# Altium PCB 2_ASCII.pcbdoc
Units mm, origin at the board's own origin, x right, y up, seen from the top; angles counter-clockwise.
Board outline 38 x 32 mm, 2 copper layers (Top Layer, Bottom Layer); 28 components, 38 nets, 175 pads, 63 vias.
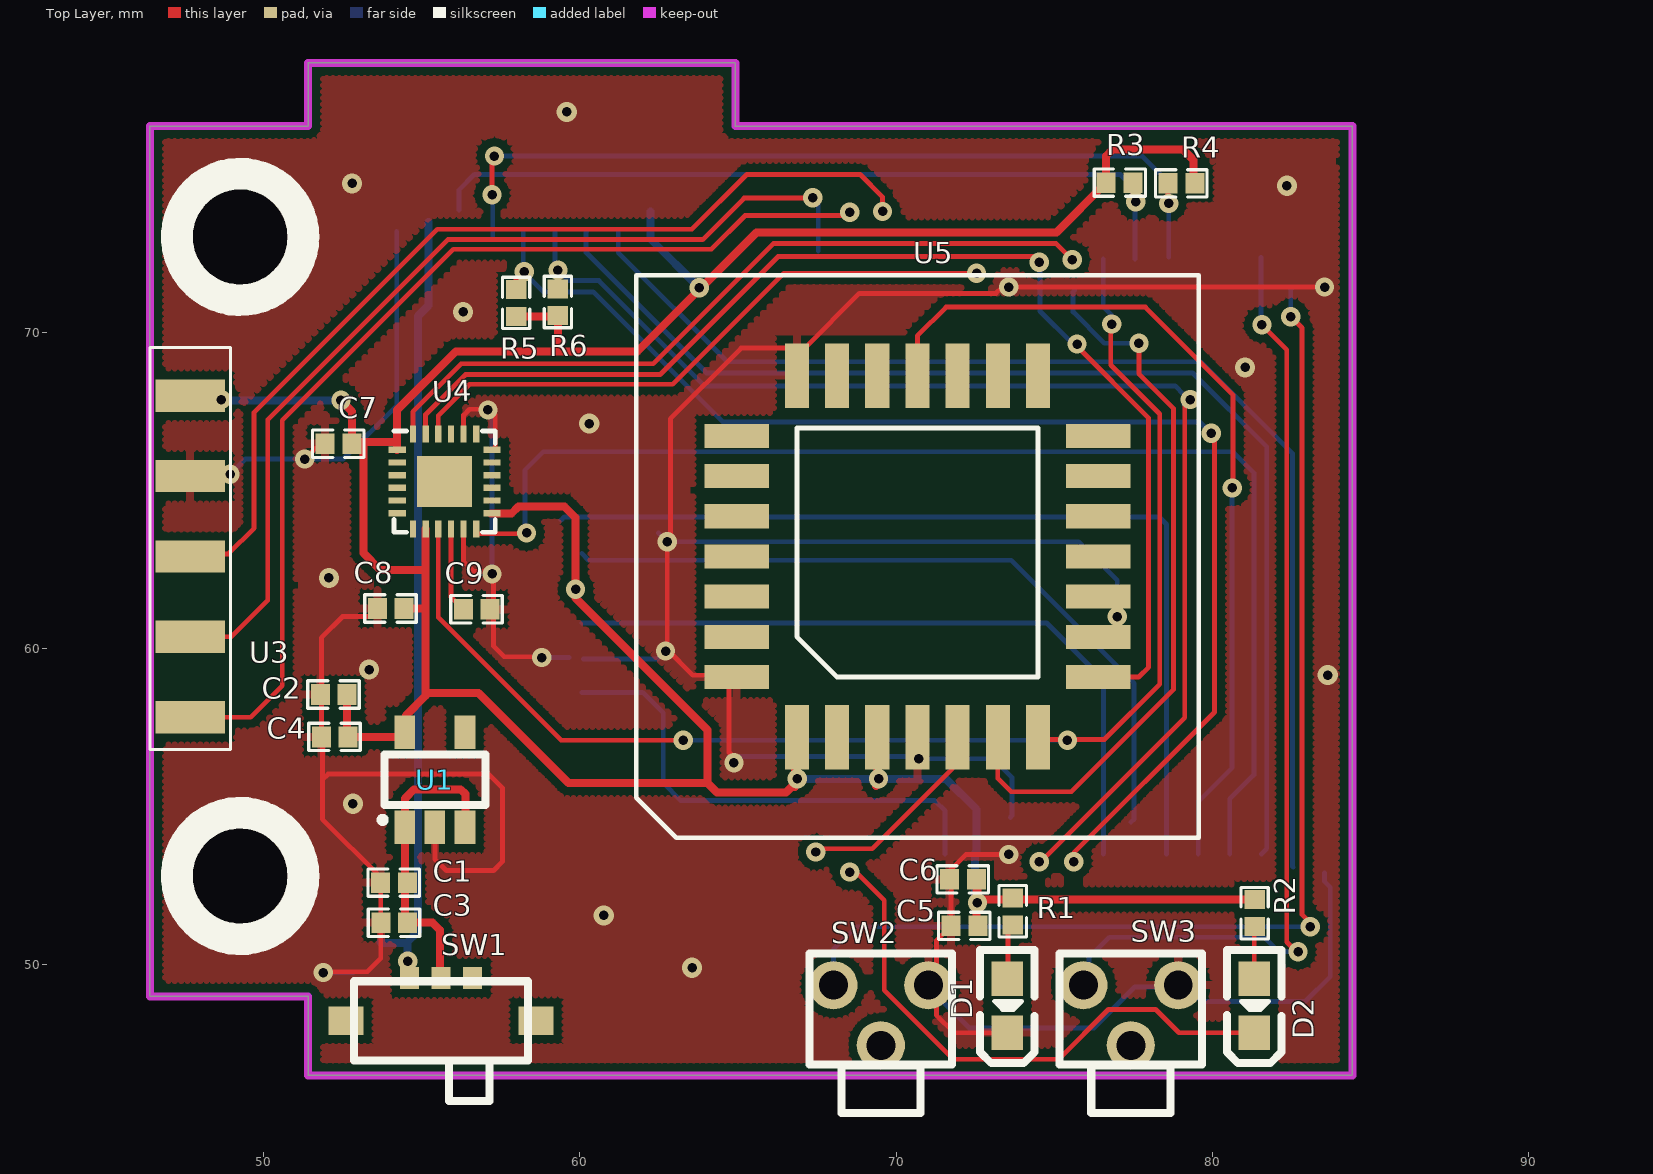
[diagram p0: Top Layer view]
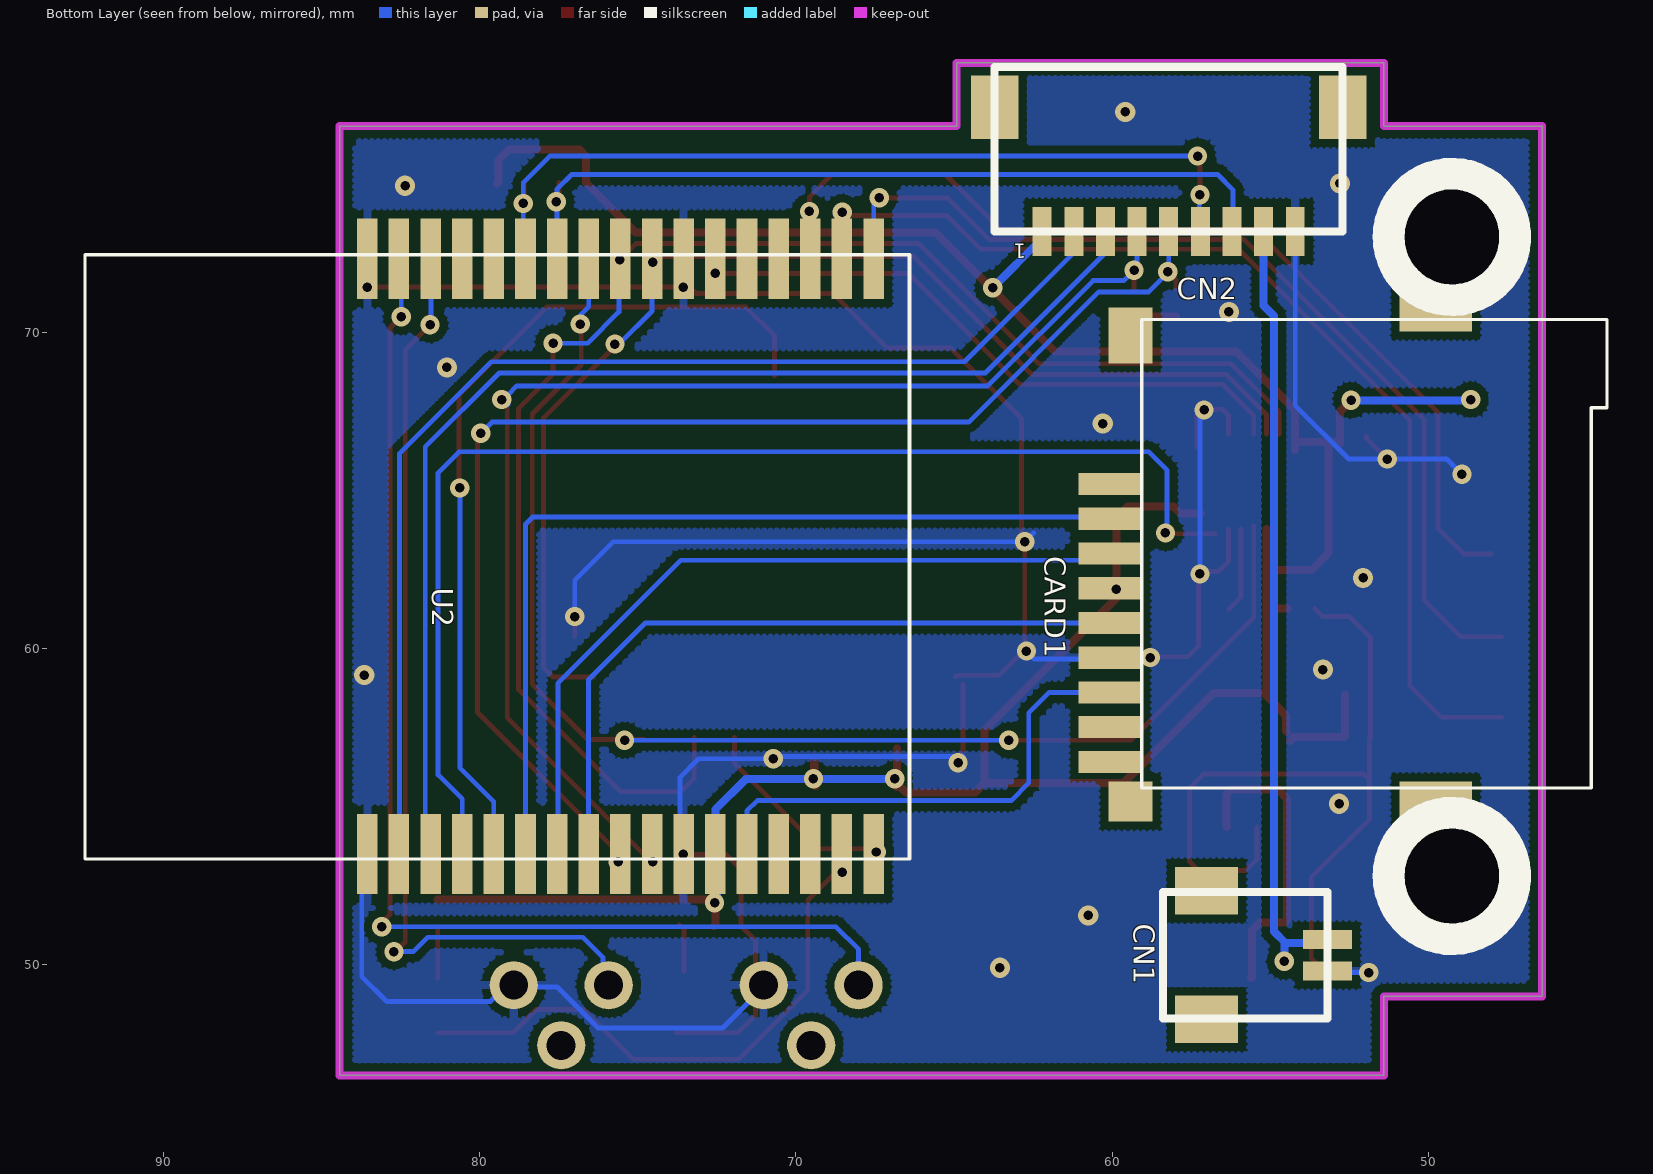
[diagram p1: Bottom Layer view, seen from below]

## Layer stack, top to bottom
Top Solder: solder mask 0.0102, Solder Resist, Dk 3.5
Top Layer: signal copper 0.0356
Dielectric1: dielectric 0.32, FR-4, Dk 4.8
Bottom Layer: signal copper 0.0356
Bottom Solder: solder mask 0.0102, Solder Resist, Dk 3.5

## Board outline
51.416,46.509 51.416,49.009 46.416,49.009 46.416,76.509 51.416,76.509 51.416,78.509 64.916,78.509 64.916,76.509 84.416,76.509 84.416,46.509

## Design rules (kind name [scope] priority, off if disabled: settings)
AssemblyTestPointUsage [All] p0: scope1count=1 scope1_0_kind=Board scope1_0_value=Board scope2count=1 scope2_0_kind=Board scope2_0_value=Board commentlength=0
AssemblyTestpoint [All] p0: scope1count=1 scope1_0_kind=Board scope1_0_value=Board scope2count=1 scope2_0_kind=Board scope2_0_value=Board commentlength=0
Clearance Clearance_1 [All] p0 off: scope1count=1 scope1_0_kind=Board scope1_0_value=Board scope2count=1 scope2_0_kind=Board scope2_0_value=Board commentlength=50 gap=0.254 // Protel DXP Scope 1 Expression Was: (InPolygon)
Clearance [All] p0: scope1count=1 scope1_0_kind=Board scope1_0_value=Board scope2count=1 scope2_0_kind=Board scope2_0_value=Board commentlength=0 gap=0.152
Clearance Clearance_1 [(InPolygon)] p1: gap=0.254 ignorepadtopadclearanceinfootprint=FALSE except(0: Arc-Hole Track-Hole SMDPad-Hole THPad-Hole Via-Hole Fill-Hole Poly-Hole Region-Hole Text-Hole)
Clearance [All] p2: gap=0.152 ignorepadtopadclearanceinfootprint=FALSE except(0: Arc-Hole Track-Hole SMDPad-Hole THPad-Hole Via-Hole Fill-Hole Poly-Hole Region-Hole Text-Hole)
ComponentClearance [All] p0 off: scope1count=1 scope1_0_kind=Board scope1_0_value=Board scope2count=1 scope2_0_kind=Board scope2_0_value=Board commentlength=0 gap=0.254 collisioncheckmode=3
ComponentClearance [All] p1 off: gap=0.254 collisioncheckmode=3 verticalgap=0.254 showdistances=FALSE
DiffPairsRouting [All] p0: scope1count=1 scope1_0_kind=Board scope1_0_value=Board scope2count=1 scope2_0_kind=Board scope2_0_value=Board commentlength=0
FabricationTestPointUsage TestPointUsage [All] p0: scope1count=1 scope1_0_kind=Board scope1_0_value=Board scope2count=1 scope2_0_kind=Board scope2_0_value=Board commentlength=0 valid=0 allowmultiple=FALSE
FabricationTestPointUsage TestPointUsage [All] p1: valid=0 allowmultiple=FALSE
FabricationTestpoint Testpoint [All] p0: scope1count=1 scope1_0_kind=Board scope1_0_value=Board scope2count=1 scope2_0_kind=Board scope2_0_value=Board commentlength=0 side=3 testpointundercomponent=TRUE minsize=1.016 maxsize=2.54 preferedsize=1.524 minholesize=0 maxholesize=1.016 preferedholesize=0.813 testpointgrid=0.025
FabricationTestpoint Testpoint [All] p1: side=3 testpointundercomponent=TRUE minsize=1.016 maxsize=2.54 preferedsize=1.524 minholesize=0 maxholesize=1.016 preferedholesize=0.813 testpointgrid=0.025 allowsidetop=TRUE allowsidebottom=TRUE usegrid=TRUE gridtolerance=0
FanoutControl Fanout_BGA [All] p0 off: scope1count=1 scope1_0_kind=Board scope1_0_value=Board scope2count=1 scope2_0_kind=Board scope2_0_value=Board commentlength=69 // Protel DXP Scope 1 Expression Was: IsBGA   Fanout_BGA (Default Rule)
FanoutControl Fanout_LCC [All] p0 off: scope1count=1 scope1_0_kind=Board scope1_0_value=Board scope2count=1 scope2_0_kind=Board scope2_0_value=Board commentlength=69 // Protel DXP Scope 1 Expression Was: IsLCC   Fanout_LCC (Default Rule)
FanoutControl Fanout_SOIC [All] p0 off: scope1count=1 scope1_0_kind=Board scope1_0_value=Board scope2count=1 scope2_0_kind=Board scope2_0_value=Board commentlength=71 // Protel DXP Scope 1 Expression Was: IsSOIC   Fanout_SOIC (Default Rule)
FanoutControl Fanout_Small [All] p0 off: scope1count=1 scope1_0_kind=Board scope1_0_value=Board scope2count=1 scope2_0_kind=Board scope2_0_value=Board commentlength=84 // Protel DXP Scope 1 Expression Was: (CompPinCount < 5)   Fanout_Small (Default Rule)
FanoutControl Fanout_Default [All] p0: scope1count=1 scope1_0_kind=Board scope1_0_value=Board scope2count=1 scope2_0_kind=Board scope2_0_value=Board commentlength=30 // Fanout_Default (Default Rule)
Height [All] p0: scope1count=1 scope1_0_kind=Board scope1_0_value=Board scope2count=1 scope2_0_kind=Board scope2_0_value=Board commentlength=0
HoleSize [All] p0: scope1count=1 scope1_0_kind=Board scope1_0_value=Board scope2count=1 scope2_0_kind=Board scope2_0_value=Board commentlength=0 absolutevalues=TRUE maxlimit=2.54 minlimit=0.025 maxpercent=80.000 minpercent=20.000
HoleToHoleClearance [All] p0: scope1count=1 scope1_0_kind=Board scope1_0_value=Board scope2count=1 scope2_0_kind=Board scope2_0_value=Board commentlength=0
LayerPairs [All] p0: scope1count=1 scope1_0_kind=Board scope1_0_value=Board scope2count=1 scope2_0_kind=Board scope2_0_value=Board commentlength=0 enforce=TRUE
MinimumSolderMaskSliver [All] p0: scope1count=1 scope1_0_kind=Board scope1_0_value=Board scope2count=1 scope2_0_kind=Board scope2_0_value=Board commentlength=0
NetAntennae [All] p0: scope1count=1 scope1_0_kind=Board scope1_0_value=Board scope2count=1 scope2_0_kind=Board scope2_0_value=Board commentlength=0
PasteMaskExpansion [All] p0: scope1count=1 scope1_0_kind=Board scope1_0_value=Board scope2count=1 scope2_0_kind=Board scope2_0_value=Board commentlength=0 expansion=0
PlaneClearance [All] p0: scope1count=1 scope1_0_kind=Board scope1_0_value=Board scope2count=1 scope2_0_kind=Board scope2_0_value=Board commentlength=0 clearance=0.508
PlaneConnect [All] p0: scope1count=1 scope1_0_kind=Board scope1_0_value=Board scope2count=1 scope2_0_kind=Board scope2_0_value=Board commentlength=0 planeconnectstyle=Relief reliefexpansion=0.508 reliefentries=4 reliefconductorwidth=0.254 reliefairgap=0.254
PolygonConnect [All] p0 off: scope1count=1 scope1_0_kind=Board scope1_0_value=Board scope2count=1 scope2_0_kind=Board scope2_0_value=Board commentlength=44 connectstyle=Direct reliefconductorwidth=0.254 reliefentries=4 polygonreliefangle="90 Angle" // Protel DXP Scope 1 Expression Was: isvia
PolygonConnect [isvia] p1: connectstyle=Direct reliefconductorwidth=0.254 reliefentries=4 polygonreliefangle="90 Angle" airgapwidth=0.254
RoutingCorners [All] p0: scope1count=1 scope1_0_kind=Board scope1_0_value=Board scope2count=1 scope2_0_kind=Board scope2_0_value=Board commentlength=0 cornerstyle=45-Degree minsetback=2.54 maxsetback=2.54
RoutingLayers [All] p0: scope1count=1 scope1_0_kind=Board scope1_0_value=Board scope2count=1 scope2_0_kind=Board scope2_0_value=Board commentlength=0 top layer=Automatic bottom layer=Automatic
RoutingPriority [All] p0: scope1count=1 scope1_0_kind=Board scope1_0_value=Board scope2count=1 scope2_0_kind=Board scope2_0_value=Board commentlength=0
RoutingTopology [All] p0: scope1count=1 scope1_0_kind=Board scope1_0_value=Board scope2count=1 scope2_0_kind=Board scope2_0_value=Board commentlength=0 topology=Shortest
RoutingVias [All] p0: scope1count=1 scope1_0_kind=Board scope1_0_value=Board scope2count=1 scope2_0_kind=Board scope2_0_value=Board commentlength=0 holewidth=0.711 width=1.27 viastyle="Through Hole" minholewidth=0.3 minwidth=0.6 maxholewidth=0.711 maxwidth=1.27
RoutingVias [All] p1: holewidth=0.711 width=1.27 viastyle="Through Hole" minholewidth=0.3 minwidth=0.6 maxholewidth=0.711 maxwidth=1.27
ShortCircuit [All] p0: scope1count=1 scope1_0_kind=Board scope1_0_value=Board scope2count=1 scope2_0_kind=Board scope2_0_value=Board commentlength=0 allowed=FALSE
SilkToBoardRegionClearance [All] p0: scope1count=1 scope1_0_kind=Board scope1_0_value=Board scope2count=1 scope2_0_kind=Board scope2_0_value=Board commentlength=0
SilkToSilkClearance [All] p0: scope1count=1 scope1_0_kind=Board scope1_0_value=Board scope2count=1 scope2_0_kind=Board scope2_0_value=Board commentlength=0
SilkToSolderMaskClearance [All] p0 off: scope1count=1 scope1_0_kind=Board scope1_0_value=Board scope2count=1 scope2_0_kind=Board scope2_0_value=Board commentlength=44 // Protel DXP Scope 1 Expression Was: IsPad
SolderMaskExpansion [All] p0: scope1count=1 scope1_0_kind=Board scope1_0_value=Board scope2count=1 scope2_0_kind=Board scope2_0_value=Board commentlength=0 expansion=0.102
SolderMaskExpansion [All] p1: expansion=0.102
UnRoutedNet [All] p0: scope1count=1 scope1_0_kind=Board scope1_0_value=Board scope2count=1 scope2_0_kind=Board scope2_0_value=Board commentlength=0
UnpouredPolygon [All] p0: scope1count=1 scope1_0_kind=Board scope1_0_value=Board scope2count=1 scope2_0_kind=Board scope2_0_value=Board commentlength=0
Width Width_2 [All] p0: scope1count=1 scope1_0_kind=Net scope1_0_value=VCC3.7 scope2count=1 scope2_0_kind=Board scope2_0_value=Board commentlength=0 maxlimit=0.254 minlimit=0.254 preferedwidth=0.254
Width Width_1 [All] p0: scope1count=1 scope1_0_kind=Net scope1_0_value=VCC3.3 scope2count=1 scope2_0_kind=Board scope2_0_value=Board commentlength=0 maxlimit=0.254 minlimit=0.254 preferedwidth=0.254
Width [All] p0: scope1count=1 scope1_0_kind=Board scope1_0_value=Board scope2count=1 scope2_0_kind=Board scope2_0_value=Board commentlength=0 maxlimit=0.254 minlimit=0.152 preferedwidth=0.254
Width Width_2 [InNet('VCC3.7')] p1: maxlimit=0.254 minlimit=0.254 preferedwidth=0.254
Width Width_1 [InNet('VCC3.3')] p2: maxlimit=0.254 minlimit=0.254 preferedwidth=0.254
Width [All] p3: maxlimit=0.254 minlimit=0.152 preferedwidth=0.254 minimp=50.000000 maximp=50.000000 favimp=50.000000
27 further rules are at their usual default settings.

## Components (designator, comment, footprint, x,y, rotation, side; value= is the part's Value field where it differs from the comment)
C1 "10uF" 0402 54.126,52.6 r0 top
C2 "10uF" 0402 52.222,58.547 r0 top
C3 "100nF" 0402 54.135,51.333 r0 top
C4 "100nF" 0402 52.257,57.204 r0 top
C5 "10uF" 0402 72.161,51.232 r0 top
C6 "100nF" 0402 72.111,52.705 r0 top
C7 "10nF" 0402 52.375,66.472 r0 top
C8 "100nF" 0402 54.026,61.265 r0 top
C9 "100nF" 0402 56.744,61.239 r0 top
CARD1 "HYC77-TF09-200" TF-015 54.916,62.909 r270 bottom locked
CN1 "A1002WV-S-2P" A1002WR-S-2P_LEO 55.116,50.309 r90 bottom
CN2 "A1002WR-S-9P" A1002WR-S-9P_LEO 58.216,75.109 r180 bottom locked
D1 "RED" LED-0603 73.516,48.709 r90 top
D2 "GREEN" LED-0603 81.316,48.709 r90 top
R1 "1K" 0402 73.685,51.689 r270 top
R2 "200" 0402 81.331,51.638 r90 top
R3 "10K" 0402 77.064,74.727 r180 top
R4 "10K" 0402 79.019,74.701 r0 top
R5 "10K" 0402 57.988,70.917 r270 top
R6 "10K" 0402 59.309,70.942 r270 top
SW1 "SSAJ120100" SW-SMD-5.5X2.5 55.616,48.909 r0 top
SW2 "KAN4562-0501C" KAN4562-0501C 69.516,48.409 r0 top
SW3 "KAN4562-0501C" KAN4562-0501C 77.416,48.409 r0 top
U1 "SPX3819M5-L-3-3/TR" SOT-23-5 55.423,55.855 r90 top
U2 "DWM1001" DWM1001 79.416,62.909 r270 bottom locked
U3 "GPS_Header" GPS_HEADER_SMT_NEW 46.416,49.809 r90 top locked
U4 "MPU-9250" QFN-24-1EP_3X3MM_PITCH0.4MM 55.728,65.278 r0 top
U5 "MTi-1" PLCC-28 70.673,62.909 r0 top locked

## Footprints (in the part's own frame and the unit in brackets; to place one, negate y for a bottom-side part, rotate by r counter-clockwise, add the part's x,y. Pads: shape width x height; smd on the part's side, far side on the other; paste and mask are expansions set on the pad)
0402 [mm]
  rect 0.6x0.65 smd: 1(-0.424,0) 2(0.424,0)
  silkscreen extent -0.82,-0.43 0.81,0.43
A1002WR-S-2P_LEO [mm]
  rect 0.6x1.55 smd: 1(-0.502,-1.925) 2(0.498,-1.925)
  rect 1.5x2 smd: 3(-2.032,1.905) 4(2.032,1.905)
  silkscreen extent -2,-1.92 2,3.27
A1002WR-S-9P_LEO [mm]
  rect 0.6x1.55 smd: 1(-4,-1.923) 2(-3,-1.923) 3(-1.996,-1.925) 4(-1.001,-1.923) 5(0,-1.923) 6(1.001,-1.923) 7(1.999,-1.923) 8(2.998,-1.923) 9(4,-1.923)
  rect 1.5x2 smd: 10(-5.499,1.999) 11(5.5,1.999)
  silkscreen extent -5.5,-1.92 5.5,3.28
DWM1001 [mm]
  rect 2.54x0.65 smd: 1(9.406,-4.129) 2(9.406,-3.129) 3(9.406,-2.129) 4(9.406,-1.128) 5(9.406,-0.13) 6(9.406,0.871) 7(9.406,1.872) 8(9.406,2.87) 9(9.406,3.871) 10(9.406,4.872) 11(9.406,5.871) 12(9.406,6.871) 13(9.406,7.871) 14(9.406,8.872) 15(9.406,9.87) 16(9.406,10.871) 17(9.406,11.872) 18(-9.406,11.872) 19(-9.406,10.871) 20(-9.406,9.87) 21(-9.406,8.872) 22(-9.406,7.871) 23(-9.406,6.871) 24(-9.406,5.871) 25(-9.406,4.872) 26(-9.406,3.871) 27(-9.406,2.87) 28(-9.406,1.872) 29(-9.406,0.871) 30(-9.406,-0.13) 31(-9.406,-1.128) 32(-9.406,-2.129) 33(-9.406,-3.129) 34(-9.406,-4.129)
  silkscreen extent -9.54,-13.05 9.56,13.02
GPS_HEADER_SMT_NEW [mm]
  rect 1.02x2.2 smd: 1(18.18,-1.27) 2(15.64,-1.27) 3(13.1,-1.27) 4(10.56,-1.27) 5(8.02,-1.27)
  round 3 hole 3 unplated: ""(3,-2.85) ""(23.2,-2.85)
  silkscreen extent 1,-4.85 25.2,0
KAN4562-0501C [mil]
  round 60 hole 36: 0(0,-37.4) 1(-59.05,37.4) 2(59.07,37.4)
  silkscreen extent -89,-122 89,77
LED-0603 [mil]
  rect 43x39 smd: 1(33.51,0) 2(-33.5,0)
  silkscreen extent -72,-34 70,34
PLCC-28 [mil]
  rect 80x30 smd: 1(-225,0) 2(-225,-50) 3(-225,-100) 4(-225,-150) 12(225,-150) 13(225,-100) 14(225,-50) 15(225,0) 16(225,50) 17(225,100) 18(225,150) 26(-225,150) 27(-225,100) 28(-225,50)
  rect 30x80 smd: 5(-150,-225) 6(-100,-225) 7(-50,-225) 8(0,-225) 9(50,-225) 10(100,-225) 11(150,-225) 19(150,225) 20(100,225) 21(50,225) 22(0,225) 23(-50,225) 24(-100,225) 25(-150,225)
  silkscreen extent -350,-350 350,350
QFN-24-1EP_3X3MM_PITCH0.4MM [mm]
  rect 0.55x0.2 smd: 1(-1.5,1) 2(-1.5,0.6) 3(-1.5,0.2) 4(-1.5,-0.2) 5(-1.5,-0.6) 6(-1.5,-1) 13(1.5,-1) 14(1.5,-0.6) 15(1.5,-0.2) 16(1.5,0.2) 17(1.5,0.6) 18(1.5,1)
  rect 0.2x0.55 smd: 7(-1,-1.501) 8(-0.599,-1.501) 9(-0.201,-1.501) 10(0.2,-1.501) 11(0.599,-1.501) 12(1.001,-1.501) 19(1.001,1.501) 20(0.599,1.501) 21(0.2,1.501) 22(-0.201,1.501) 23(-0.599,1.501) 24(-1,1.501)
  rect 0.875x0.8 smd: 25(-0.435,-0.401) 25(-0.435,0.399) 25(0.436,-0.401) 25(0.436,0.399)
  silkscreen extent -1.6,-1.6 1.6,1.6
SOT-23-5 [mm]
  rect 1.06x0.65 smd: 1(-1.499,0.95) 2(-1.499,0) 3(-1.499,-0.95) 4(1.501,-0.95) 5(1.501,0.95)
  silkscreen extent -1.33,-1.6 0.8,1.71
SW-SMD-5.5X2.5 [mm]
  rect 0.6x0.7 smd: 1(-1.001,0.675) 2(1.001,0.675) C(0,0.675)
  rect 1.1x0.9 smd: 4(-3.001,-0.675) 5(3.001,-0.675)
  silkscreen extent -2.75,-3.22 2.75,0.57
TF-015 [mm]
  rect 0.7x2 smd: 1(-2.291,-5.145) 2(-1.191,-5.143) 3(-0.095,-5.145) 4(1.005,-5.145) 5(2.103,-5.145) 6(3.2,-5.145) 7(4.298,-5.145) 8(5.395,-5.145) 9(6.5,-5.145)
  rect 1.27x1.397 smd: 10(7.747,-4.506)
  rect 1.27x2.286 smd: 11(7.747,5.146) 12(-7.747,5.146)
  rect 1.778x1.397 smd: 13(-6.985,-4.506)
  silkscreen extent -7.49,-4.15 7.32,10.56

## Via types
v1: diameter 0.61, hole 0.3, Top Layer to Bottom Layer, tented both sides, 51 vias
v2: diameter 0.635, hole 0.3, Top Layer to Bottom Layer, tented both sides, 12 vias

## Nets (pads, with @x,y where several pads share a name; then routed paths per layer and width w, separated by ;. In a path a pad name is that pad's centre, name@x,y a point inside that pad or via, vN(x,y) a via of type N, cw(c..) or ccw(c..) an arc to the next point about the centre after c; other vN are vias at no path point)
BUTTON_RST: SW2.1 U2.33 | length 37
  Top Layer w0.152: v1(82.474,70.485) 82.829,70.129 82.829,51.587 83.083,51.333 v1(83.083,51.206)
  Bottom Layer w0.152: SW2.1 68.016,50.49 68.732,51.206 v1(83.083,51.206) ; v1(82.474,70.485) 82.474,71.374 U2.33@82.499,71.399
BUTTON_SDCARD: SW3.1 U2.32 | length 30.5
  Top Layer w0.152: v1@81.509,70.282 82.347,69.444 82.347,50.724 82.652,50.419 v1(82.702,50.419)
  Bottom Layer w0.152: SW3.1@76.098,49.359 76.098,50.241 76.733,50.876 81.636,50.876 82.093,50.419 v1(82.702,50.419) ; U2.32@81.534,72.365 81.534,70.256 v1(81.559,70.231)
CHARGE_VC: CN1.2 CN2.8 SW1.1 | length 24.5
  Bottom Layer w0.254: CN1.2@53.696,50.724 53.721,50.698 54.534,50.698 54.889,51.054 54.889,70.51 55.22,70.841 CN2.8@55.22,73.482 ; v1(54.559,50.114) 54.559,50.673
D2_1: D2.1 R2.1 | length 1.7
  Top Layer w0.152: D2.1 81.316,51.199 R2.1
FOOT_2: CN2.4 R6.1 U2.10 | length 40
  Top Layer w0.152: R6.1 v1(59.309,71.958) ; v1(74.524,53.264) 74.574,53.264 79.121,57.81 v1@79.121,67.716
  Bottom Layer w0.152: CN2.4 59.217,72.05 59.639,71.628 60.604,71.628 63.932,68.301 78.816,68.301 79.096,68.021 v1@79.096,67.716
  other v1: 79.299,67.869
FOOT_5: CN2.5 R5.1 U2.9 | length 41.2
  Top Layer w0.152: R5.1 57.988,71.653 v1(58.242,71.907) ; v1(75.616,53.264) 75.616,53.543 80.061,57.988 v1@80.061,66.777
  Bottom Layer w0.152: CN2.5 58.216,71.908 58.852,71.272 60.427,71.272 64.541,67.158 79.604,67.158 v1(79.959,66.802)
FOOT_6: CN2.6 R4.1 U2.29 | length 27.4
  Top Layer w0.152: v1(57.226,74.346) 57.226,75.489 v1(57.302,75.565) ; R4.1 78.595,74.109 v1@78.638,74.066
  Bottom Layer w0.152: CN2.6@57.252,72.949 v1@57.252,74.397 ; v1(57.302,75.565) 77.775,75.565 78.613,74.727 U2.29@78.613,72.365
  other v1: 78.613,74.066
FOOT_7: CN2.7 R3.1 U2.28 | length 25.2
  Top Layer w0.152: R3.1 77.488,74.176 v1@77.546,74.117
  Bottom Layer w0.152: CN2.7@56.185,73.863 56.185,74.498 56.667,74.981 77.089,74.981 77.544,74.526 U2.28
  other v1: 77.572,74.117
GND: C1.1 C2.1 C3.1 C4.1 C5.1 C6.1 C7.1 C8.1 C9.2 CARD1.6 CN1.1 CN2.9 D1.2 SW2.2 SW3.2 U1.2 U2.1 U2.11 U2.24 U2.34 U3.2 U4.11 U4.18 U4.20 U5.4 U5.8 U5.13 U5.14 U5.25 | length 147.8
  Top Layer w0.152: v1(51.308,65.989) 51.968,66.65 C7.1@51.968,66.7 ; v1@51.867,49.809 51.892,49.784 53.289,49.784 53.711,50.206 53.711,52.766 51.867,54.61 51.867,57.17 C4.1 51.833,60.342 52.502,61.011 53.348,61.011 C8.1 ; 51.867,55.855 52.045,56.032 57.125,56.032 57.556,55.601 57.556,53.264 57.277,52.984 55.778,52.984 55.423,53.34 U1.2 ; U4.11 56.327,62.748 56.642,62.433 57.15,62.433 57.277,62.306 57.277,60.071 57.607,59.741 58.776,59.741 v1(58.801,59.715) ; U4.20 56.327,67.376 56.515,67.564 57.15,67.564 57.328,67.386 57.328,66.379 U4.18 ; U5.4@64.719,58.877 64.719,56.718 v1@64.795,56.642 ; U5.4 64.9,59.157 63.576,59.157 62.763,59.969 v1(62.763,63.373) 62.865,63.475 62.865,67.259 65.1,69.494 67.107,69.494 68.834,71.222 73.152,71.222 73.355,71.425 v1(83.541,71.425) ; v1@73.457,53.492 72.212,53.492 71.737,53.018 C5.1 71.272,50.767 71.272,48.412 71.831,47.854 D1.2@73.787,47.854 ; U5.14@76.962,61.544 76.987,61.519 U5.13@76.987,60.376 ; SW3.2@78.765,49.124 SW3.2@78.791,49.098
  Bottom Layer w0.152: v1(48.946,65.507) 49.428,65.989 52.527,65.989 54.215,67.677 CN2.9 ; v1@51.791,49.86 v1(51.892,49.759) CN1.1@52.857,49.759 ; v1(57.099,67.539) 57.226,67.412 v1(57.226,62.357) ; v1(58.801,59.715) CARD1.6@59.665,59.715 ; CARD1.6@60.122,59.665 62.459,59.665 v1(62.713,59.919) ; 62.484,63.652 v1(62.763,63.373) 75.768,63.373 76.987,62.154 v1(76.987,61.011) ; v1@64.719,56.591 70.409,56.591 70.688,56.312 v1@70.688,56.286 ; v1(70.714,56.515) 73.076,56.515 73.66,55.931 73.66,54.712 U2.11@73.609,54.661 ; SW2.2@71.196,49.124 72.314,48.006 76.251,48.006 77.546,49.301 79.197,49.301 79.654,48.844 82.931,48.844 83.718,49.632 83.718,52.451 83.541,52.629 U2.1@83.541,52.908
  other v1: 73.558,53.492 64.872,56.388 73.558,71.425
  other v2: 63.551,49.911 60.757,51.562 52.832,55.093 83.642,59.157 53.34,59.334 52.07,62.23 60.3,67.107 81.026,68.885 56.312,70.637 82.347,74.625 52.807,74.701 59.588,76.962
GPS_1PPS: U2.19 U3.5 | length 32.4
  Top Layer w0.152: U3.5 49.599,57.829 50.597,58.826 50.597,67.208 56.007,72.619 64.16,72.619 65.227,73.685 v1@68.58,73.685
  other v1: 68.529,73.787
GPS_UART_RX: U2.18 U3.4 | length 30.5
  Top Layer w0.152: U3.4 48.99,60.369 50.14,61.519 50.14,67.234 55.829,72.923 63.881,72.923 65.192,74.234 v1@67.361,74.234
  Bottom Layer w0.152: v1(67.361,74.244) 67.539,74.066 U2.18@67.539,72.568
GPS_UART_TX: U2.20 U3.3 | length 29.4
  Top Layer w0.152: U3.3@48.006,62.992 48.895,62.992 49.708,63.805 49.708,67.462 55.494,73.249 63.546,73.249 65.278,74.981 68.859,74.981 69.571,74.27 v1(69.571,73.812)
INT_IMUA: U2.4 U4.12 | length 39.5
  Top Layer w0.152: U4.12@56.744,63.627 58.293,63.627 v1(58.318,63.652)
  Bottom Layer w0.152: v1@58.268,63.627 58.268,65.634 58.852,66.218 80.645,66.218 81.305,65.557 81.305,56.007 80.544,55.245 U2.4
INT_IMUB: U2.5 U5.22 | length 27.7
  Top Layer w0.152: U5.22 70.673,69.886 71.577,70.79 77.876,70.79 80.645,68.021 v1@80.645,65.075
  Bottom Layer w0.152: U2.5 79.546,55.162 80.62,56.236 v1(80.62,65.075)
LED_R: D2.2 U2.16 | length 17.9
  Top Layer w0.152: v1@68.555,53.111 69.621,52.045 69.621,49.2 71.806,47.015 75.133,47.015 76.708,48.59 78.207,48.59 78.939,47.858 D2.2
  other v1: 68.529,52.934
R1_2: D1.1 R1.2 | length 1.5
  Top Layer w0.152: D1.1@73.533,49.784 73.533,51.112 R1.2
S$21: 
S$23: 
S$33: 
S$35: 
S$39: 
S$41: 
S$52: 
S$54: 
SDCARD_CLK: CARD1.5 U2.8 | length 22.7
  Bottom Layer w0.152: CARD1.5 74.754,60.806 76.556,59.004 76.556,53.513 U2.8
SDCARD_MISO: CARD1.7 U2.13 | length 15.7
  Bottom Layer w0.152: CARD1.7 61.988,58.611 62.636,57.963 62.636,55.753 63.195,55.194 71.222,55.194 71.545,54.871 U2.13
SDCARD_MOSI: CARD1.3 U2.7 | length 23.6
  Bottom Layer w0.152: CARD1.3 60.276,62.789 73.635,62.789 77.521,58.903 77.521,54.61 U2.7@77.419,54.508
SDCARD_NCS: CARD1.2 U2.6 | length 29.7
  Bottom Layer w0.152: CARD1.2@59.411,64.059 59.512,64.16 78.307,64.16 78.545,63.923 U2.6
SPI_CLK: U2.25 U4.23 U5.12 | length 38.1
  Top Layer w0.152: U4.23 55.128,67.396 56.389,68.657 62.535,68.657 66.269,72.39 v1@74.498,72.39 ; v1@75.717,69.698 75.717,69.545 77.978,67.285 77.978,59.411 77.666,59.099 U5.12
  Bottom Layer w0.152: U2.25 74.544,70.668 v1@75.565,69.647
  other v1: 75.717,69.621 74.524,72.212
SPI_MISO: U2.27 U4.9 U5.11 | length 42.6
  Top Layer w0.152: U4.9@55.524,63.777 U4.9@55.524,63.881 ; U4.9 55.527,60.983 59.411,57.099 v1(63.271,57.099) ; U5.11@74.803,57.125 76.581,57.125 78.334,58.877 78.334,67.412 76.784,68.961 v1@76.784,70.256
  Bottom Layer w0.152: v1(63.271,57.099) v1(75.413,57.099) ; U2.27 76.546,70.8 v1@76.81,70.536
  other v1: 76.81,70.256
SPI_MOSI: U2.26 U4.24 U5.10 | length 46.9
  Top Layer w0.152: U4.24 54.728,67.479 56.247,68.998 62.318,68.998 66.116,72.796 75.057,72.796 v1(75.565,72.288) ; U5.10 73.213,55.895 73.635,55.474 75.54,55.474 78.765,58.699 78.765,67.59 77.673,68.682 v1(77.673,69.647)
  Bottom Layer w0.152: U2.26@75.641,71.323 75.59,71.272 75.59,70.637 76.581,69.647 v1(77.673,69.647)
SPI_NCS_MPU92: U2.23 U4.22 | length 19.6
  Top Layer w0.152: U4.22 55.527,67.363 56.515,68.351 62.941,68.351 66.446,71.857 v1@72.695,71.857
  other v1: 72.542,71.857
SPI_NCS_MTI: U2.17 U5.9 | length 6.5
  Top Layer w0.152: v1(67.462,53.569) 67.564,53.67 69.24,53.67 71.943,56.373 U5.9
SWD_CLK: CN2.2 U2.2 | length 37.7
  Bottom Layer w0.152: CN2.2 61.216,72.515 64.668,69.063 79.629,69.063 82.525,66.167 82.525,53.111 U2.2@82.55,53.086
SWD_DIO: CN2.3 U2.3 | length 37.7
  Bottom Layer w0.152: CN2.3 60.198,73.169 60.198,72.517 64.008,68.707 79.375,68.707 81.712,66.37 81.712,53.671 U2.3
U4_10: C9.1 U4.10 | length 2.7
  Top Layer w0.152: U4.10 55.928,61.631 C9.1
VCC3.3: C2.2 C4.2 C5.2 C6.2 C7.2 C8.2 CARD1.4 CN2.1 R1.1 R2.2 R3.2 R4.2 R5.2 R6.2 U1.5 U2.12 U3.1 U4.1 U4.8 U4.13 U5.5 U5.7 | length 108.2
  Top Layer w0.254: v1(52.451,67.843) 52.799,67.495 C7.2 52.85,66.523 54.229,66.523 ; C2.2 52.647,57.238 C4.2 54.251,57.204 U1.5@54.381,57.074 ; 53.162,66.523 53.162,63.017 53.696,62.484 55.077,62.484 55.128,62.433 ; U4.1 54.228,67.537 56.084,69.393 61.824,69.393 65.583,73.152 75.064,73.152 R3.2 76.639,75.572 76.835,75.768 79.07,75.768 79.4,75.438 79.4,74.745 R4.2 ; C8.2 55.128,61.265 ; U1.5 54.508,57.391 54.508,57.887 55.128,58.506 U4.8 ; 55.128,58.598 56.794,58.598 59.639,55.753 64.033,55.753 ; U4.13@57.201,64.262 57.836,64.262 58.064,64.491 59.512,64.491 59.868,64.135 59.868,61.595 64.033,57.429 64.033,55.753 ; R5.2 59.284,70.492 R6.2 59.309,69.444 59.36,69.393 ; v1@66.802,55.626 U5.5@66.802,56.845 ; v1@66.954,55.88 66.523,55.448 64.338,55.448 64.033,55.753 ; v1@69.367,55.651 69.418,55.702 U5.7@69.418,56.566 ; C5.2 72.535,51.283 C6.2 72.568,52.672 72.568,52.121 72.626,52.063 R2.2 ; R1.1 R1.1@73.736,52.063
  Bottom Layer w0.254: v1@48.692,67.869 48.717,67.843 v1(52.451,67.843) ; CN2.1@62.23,73.812 62.23,72.949 v1(63.779,71.399) ; v1(66.878,55.88) 71.577,55.88 72.545,54.912 U2.12 ; U2.12@72.492,53.543 72.492,52.045 v1@72.542,51.994
  other v1: 72.568,51.968 69.444,55.88 59.868,61.874 48.666,67.869
VCC3.7: C1.2 C3.2 SW1.C U1.1 U1.3 | length 9.8
  Top Layer w0.254: SW1.C 55.575,49.625 55.575,51.105 55.347,51.333 C3.2 54.473,51.42 54.473,55.26 54.762,55.55 56.236,55.55 56.388,55.397 56.388,54.371 U1.3
pads on no net: CARD1.1 CARD1.8 CARD1.9 CARD1.10 CARD1.11 CARD1.12 CARD1.13 CN1.3 CN1.4 CN2.10 CN2.11 SW1.2 SW1.4 SW1.5 SW2.0 SW3.0 U1.4 U2.14 U2.15 U2.21 U2.22 U2.30 U2.31 U3. U4.2 U4.3 U4.4 U4.5 U4.6 U4.7 U4.14 U4.15 U4.16 U4.17 U4.19 U4.21 U4.25 U5.1 U5.2 U5.3 U5.6 U5.15 U5.16 U5.17 U5.18 U5.19 U5.20 U5.21 U5.23 U5.24 U5.26 U5.27 U5.28

## Polygon pours and split planes (outlines as drawn)
GND on Top Layer "Top Layer-GND" (hatched 90Degree grid 0.2 track 0.2, remove dead copper, pour order 0): 46.584,45.415 46.584,79.426 84.811,79.426 84.811,45.669
GND on Bottom Layer "Bottom Layer-GND" (hatched 90Degree grid 0.2 track 0.2, remove dead copper, pour order 2): 45.06,78.562 84.658,78.562 84.658,45.999 45.745,45.999

## Keep-outs
Keep-Out Layer:
  the board outline again, w0.254

## Text inside footprints (layer, text, board x,y; h text height)
CN2: Bottom Overlay "1" at 62.716,72.946 h0.8 r180
U3: Document "26.2" at 40.132,60.209 h2.03 r90; Document "37.4" at 65.8,40.132 h2.03 r180